# Altium PCB nanopiair_audiohat_test.PcbDoc
Units mm, origin at the board's own origin, x right, y up, seen from the top; angles counter-clockwise.
Board outline 40.01 x 40.01 mm, 4 copper layers (Top Layer, GND, POWER, Bottom Layer), stack 0.778 mm thick; 70 components, 55 nets, 271 pads, 272 vias.
Unrouted connection lines stored in the file: 9.
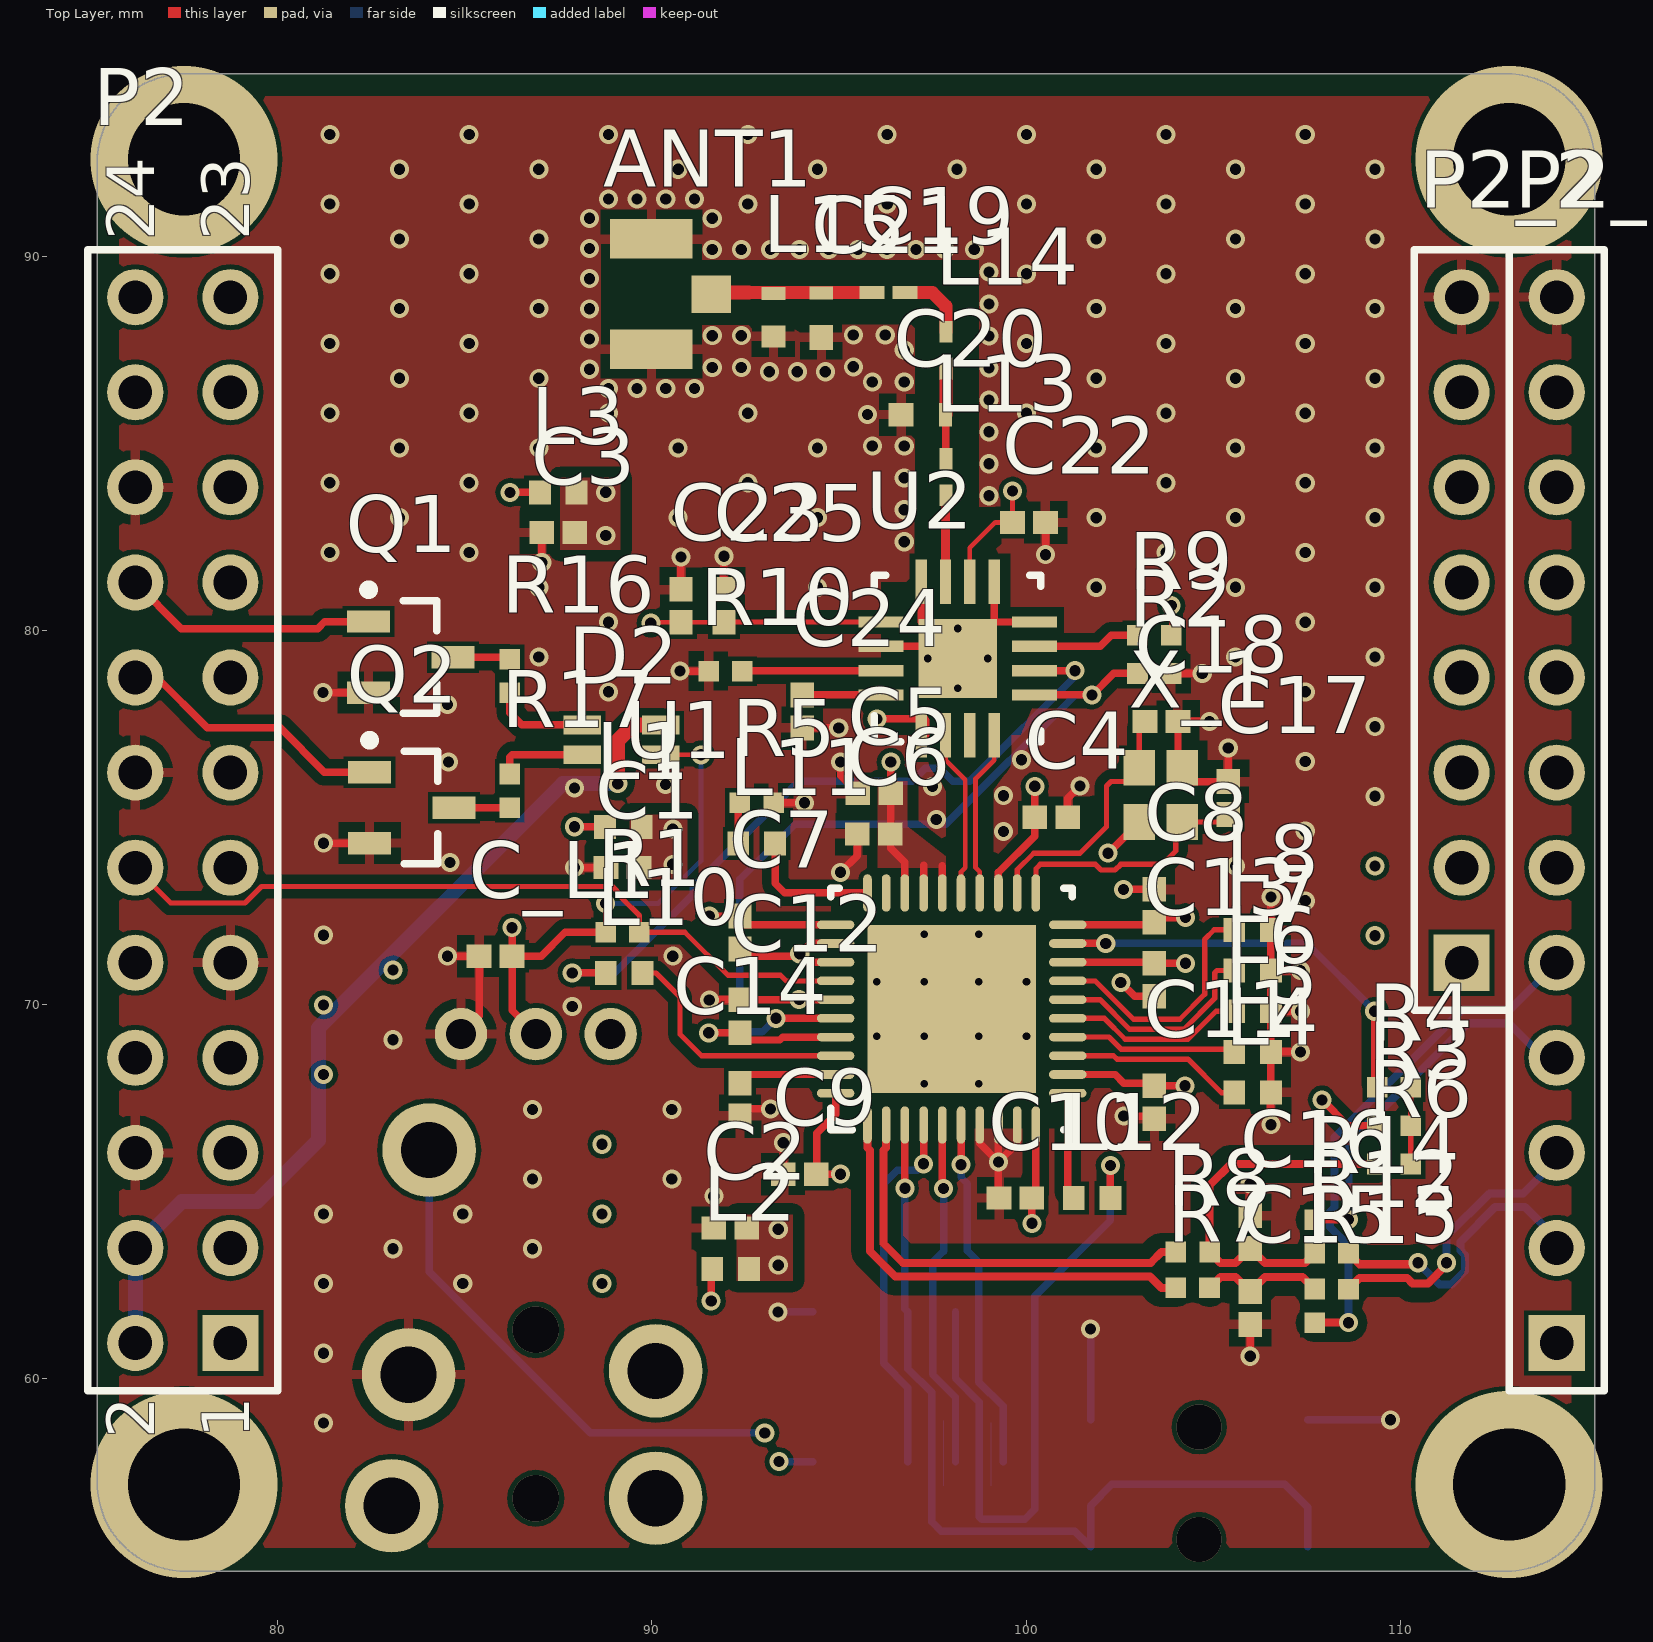
[diagram p0: Top Layer view]
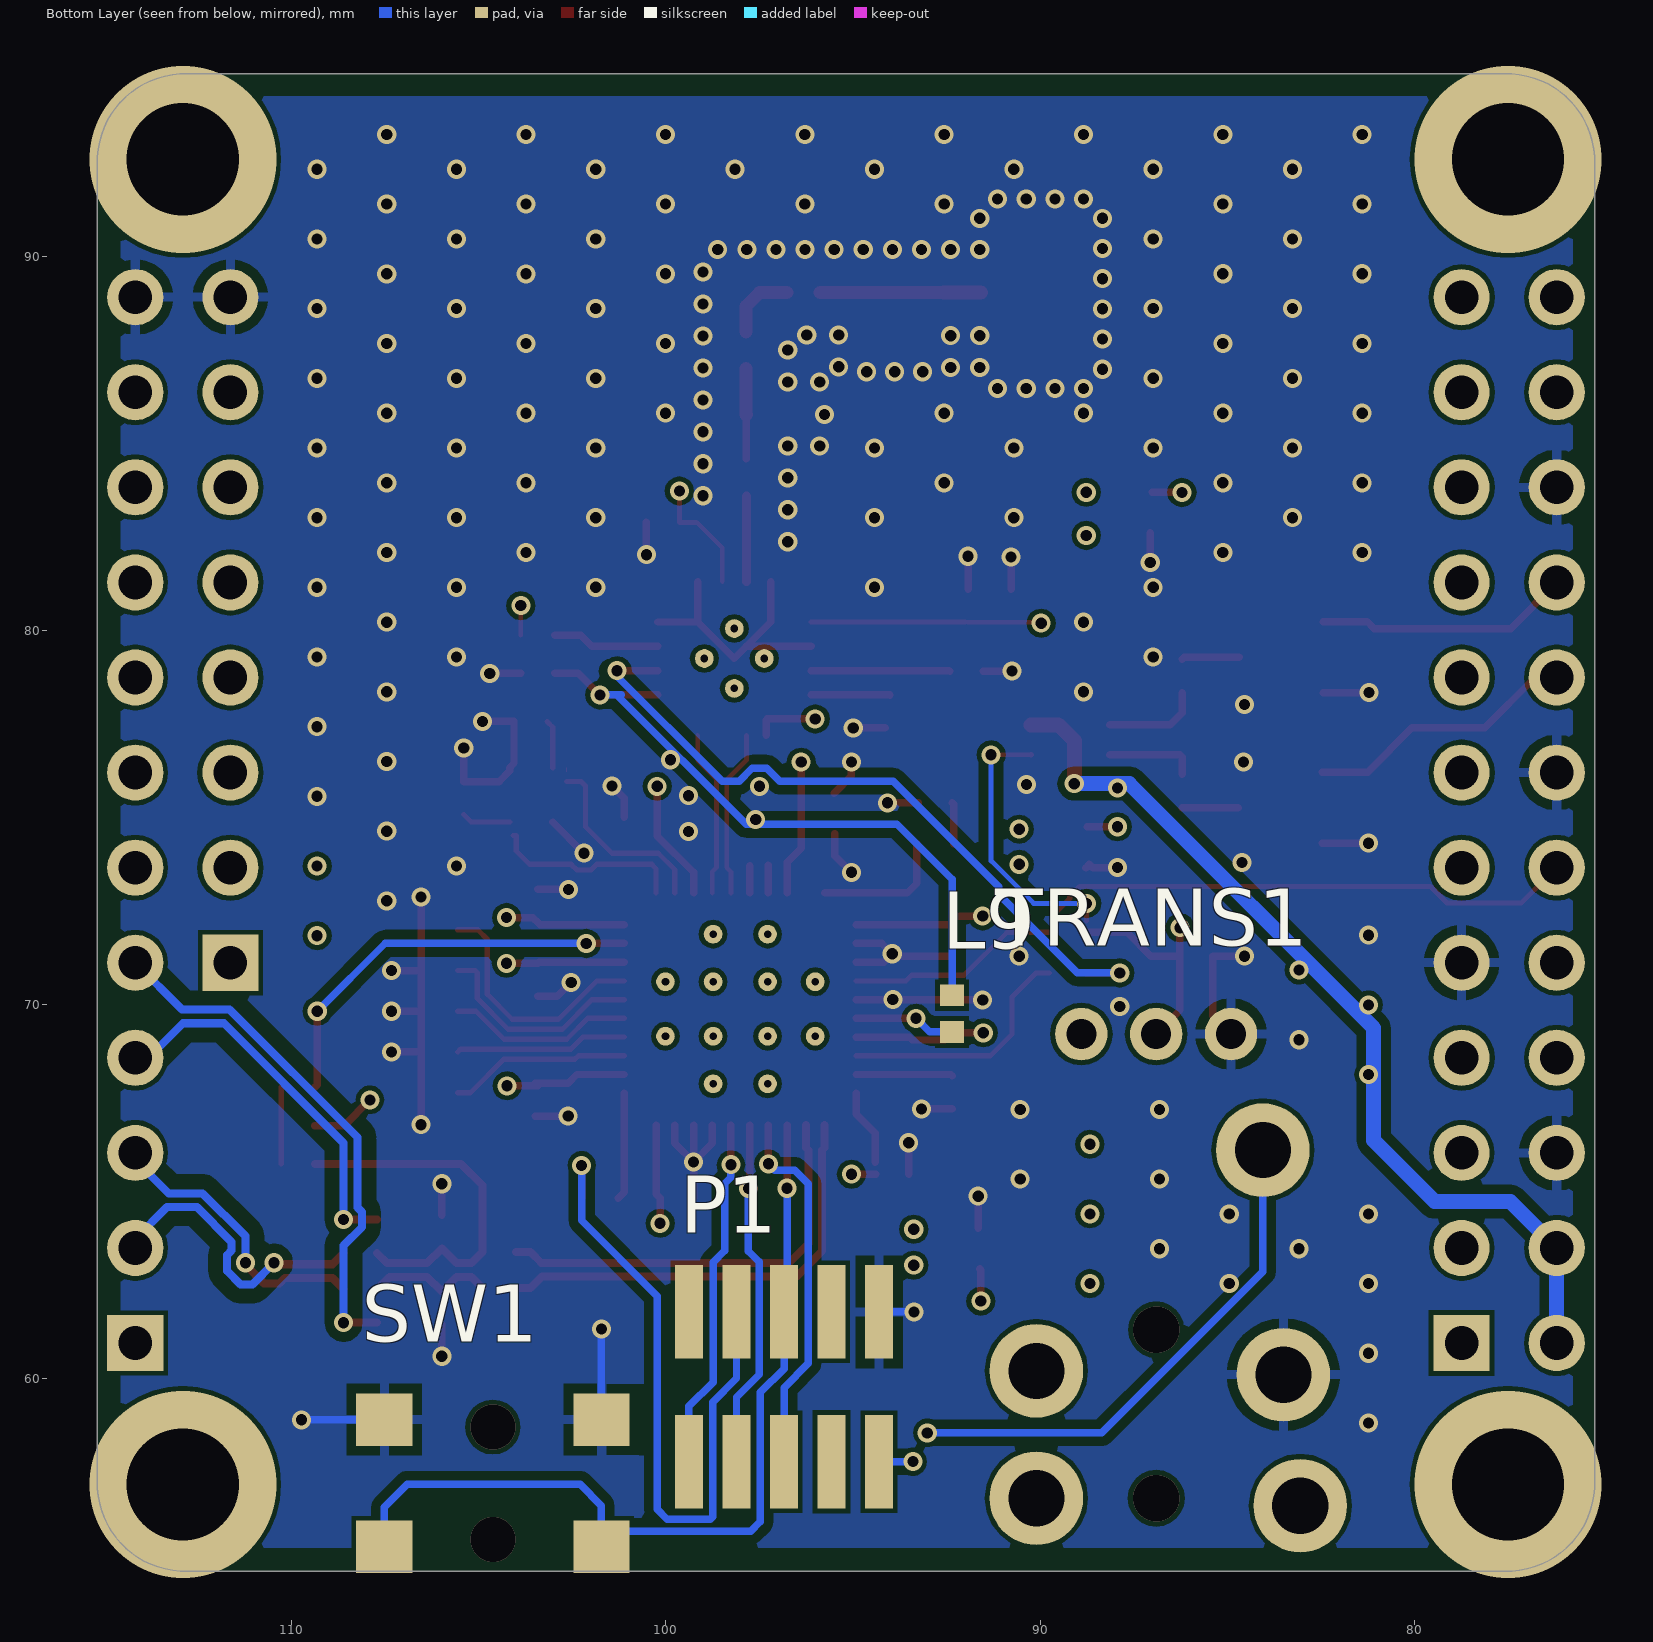
[diagram p1: Bottom Layer view, seen from below]
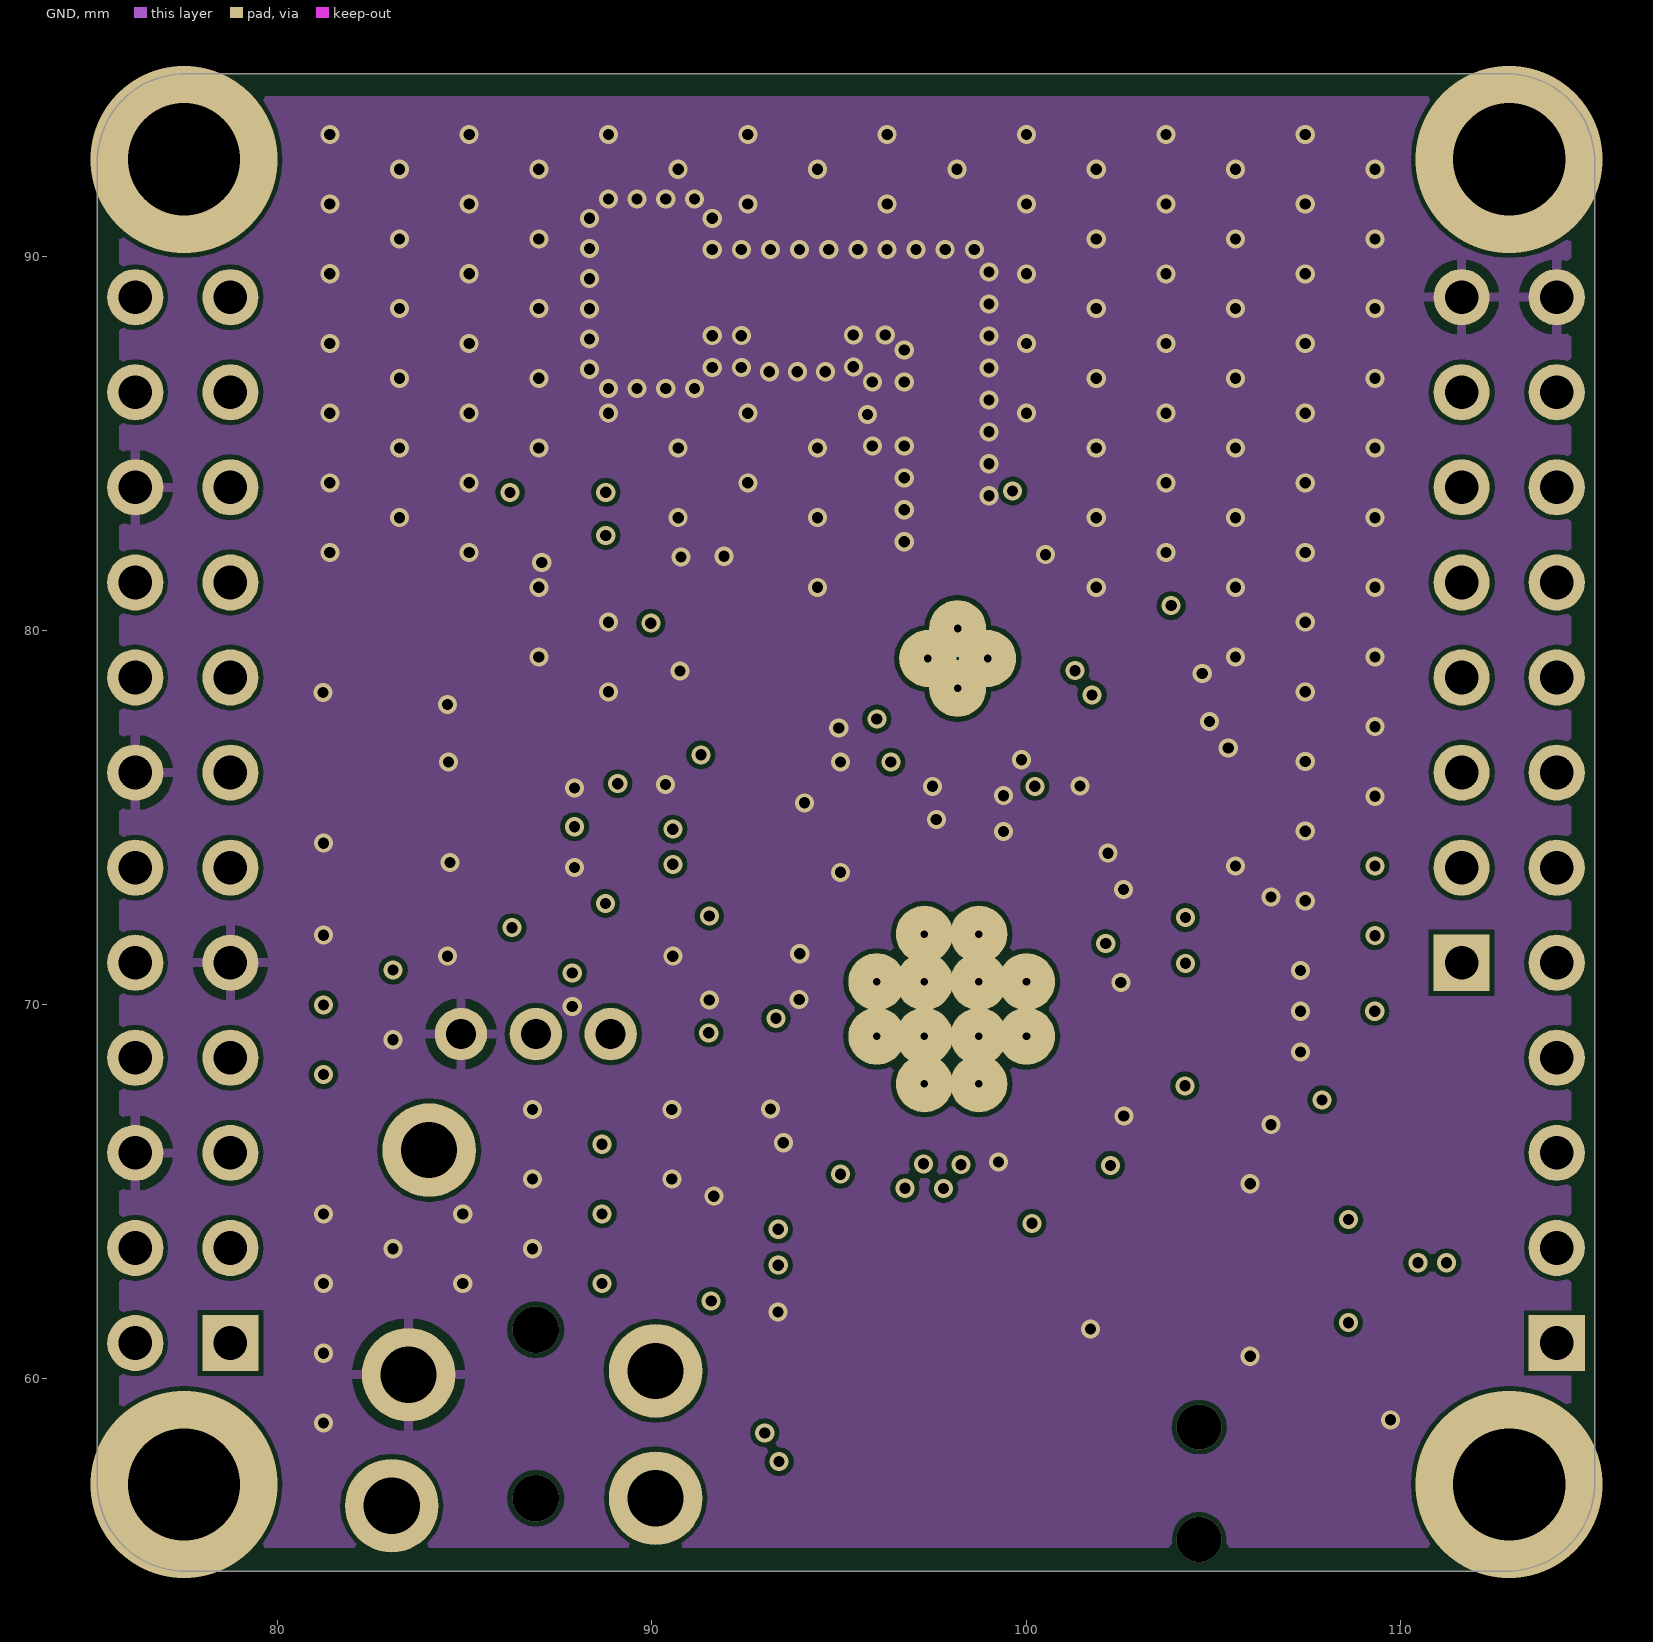
[diagram p2: GND]
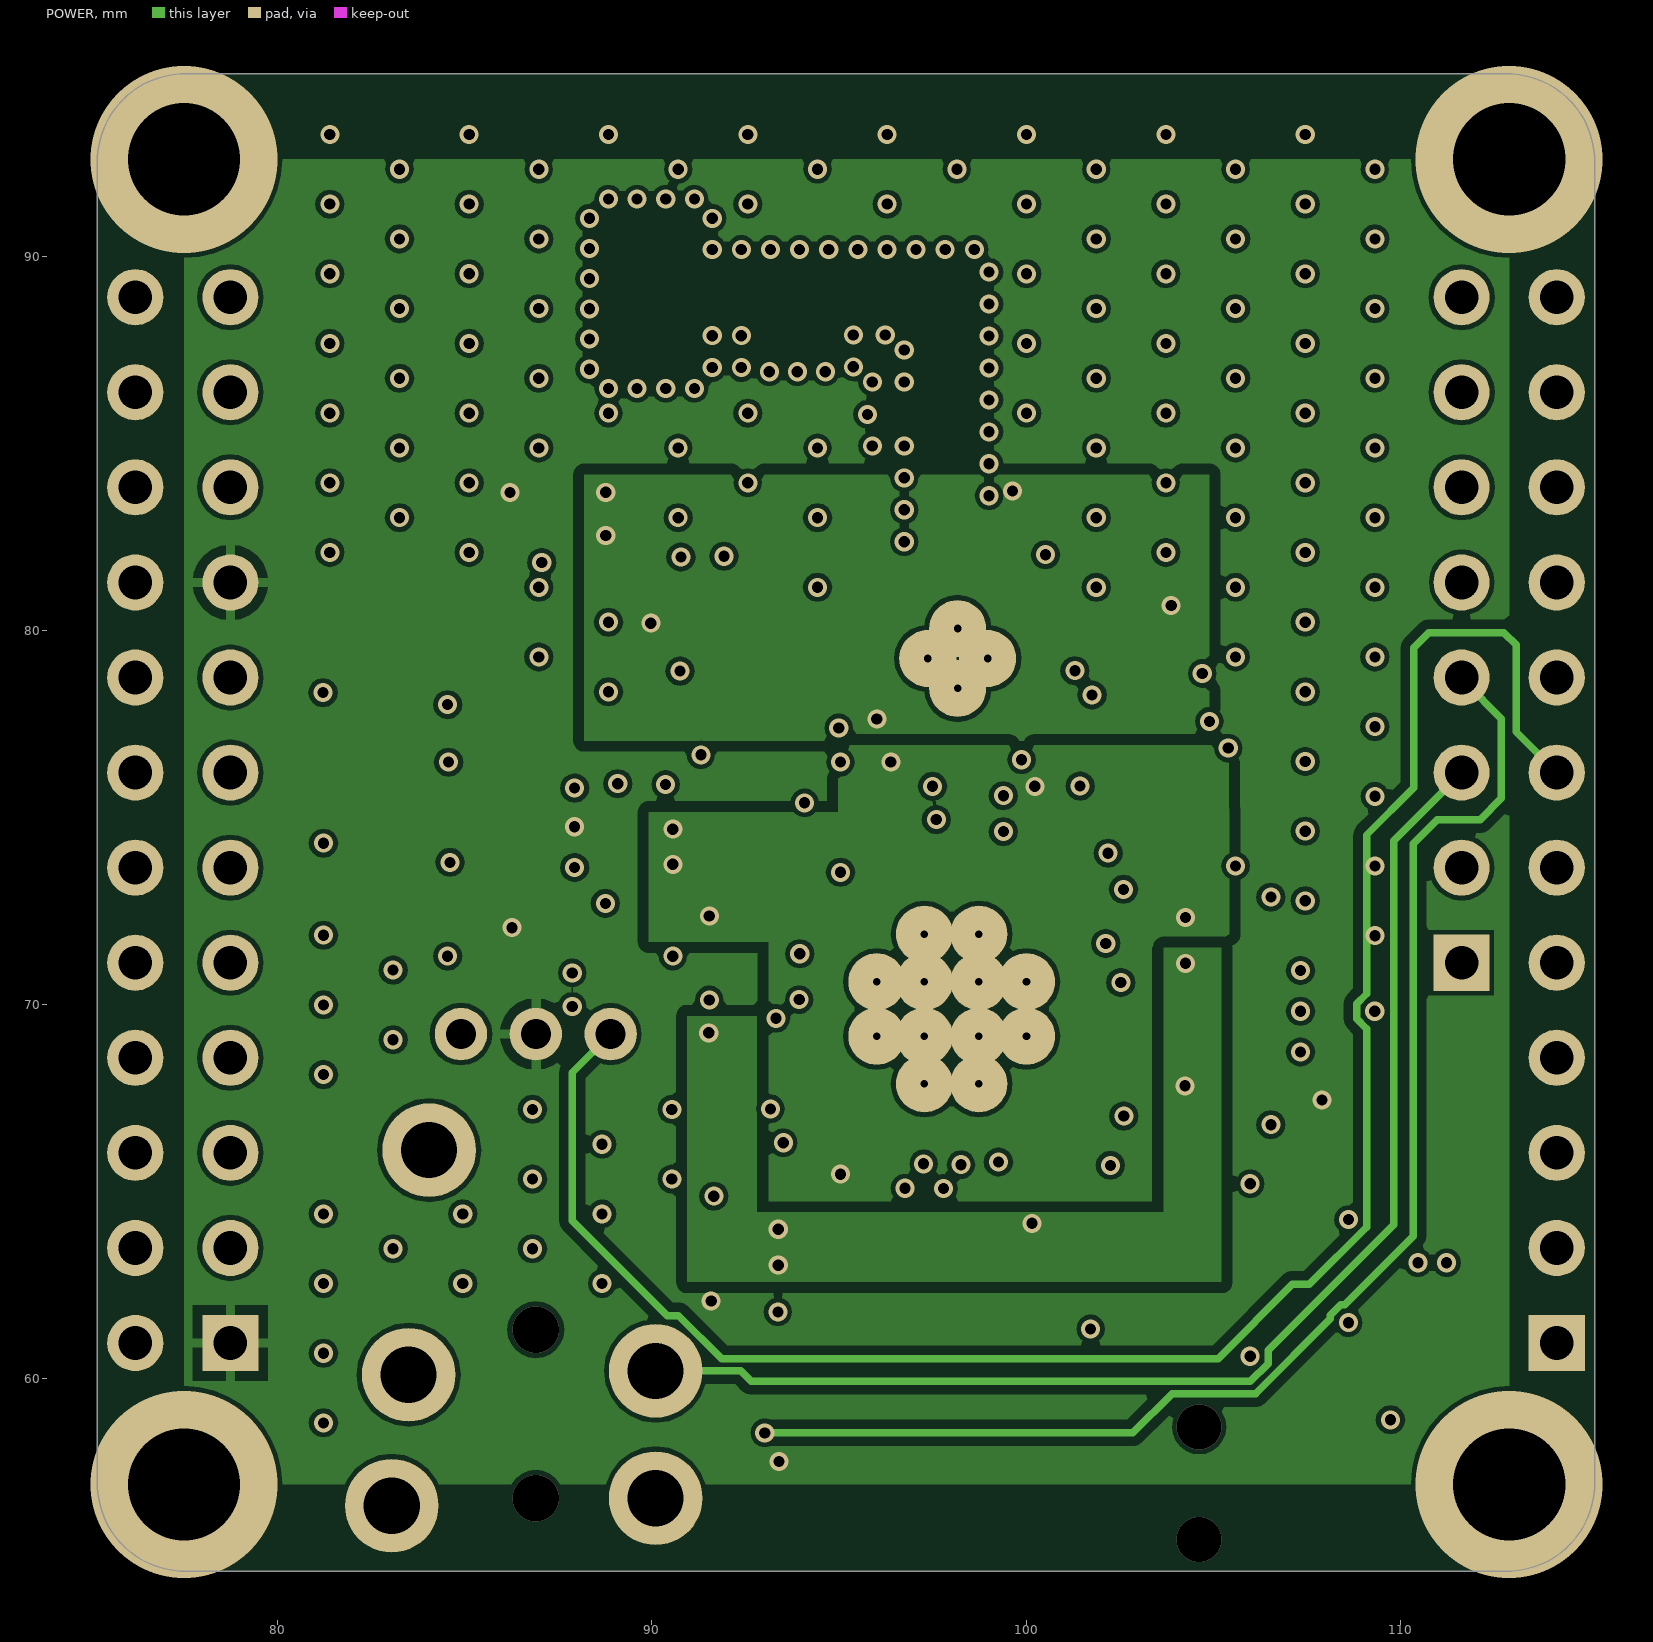
[diagram p3: POWER]
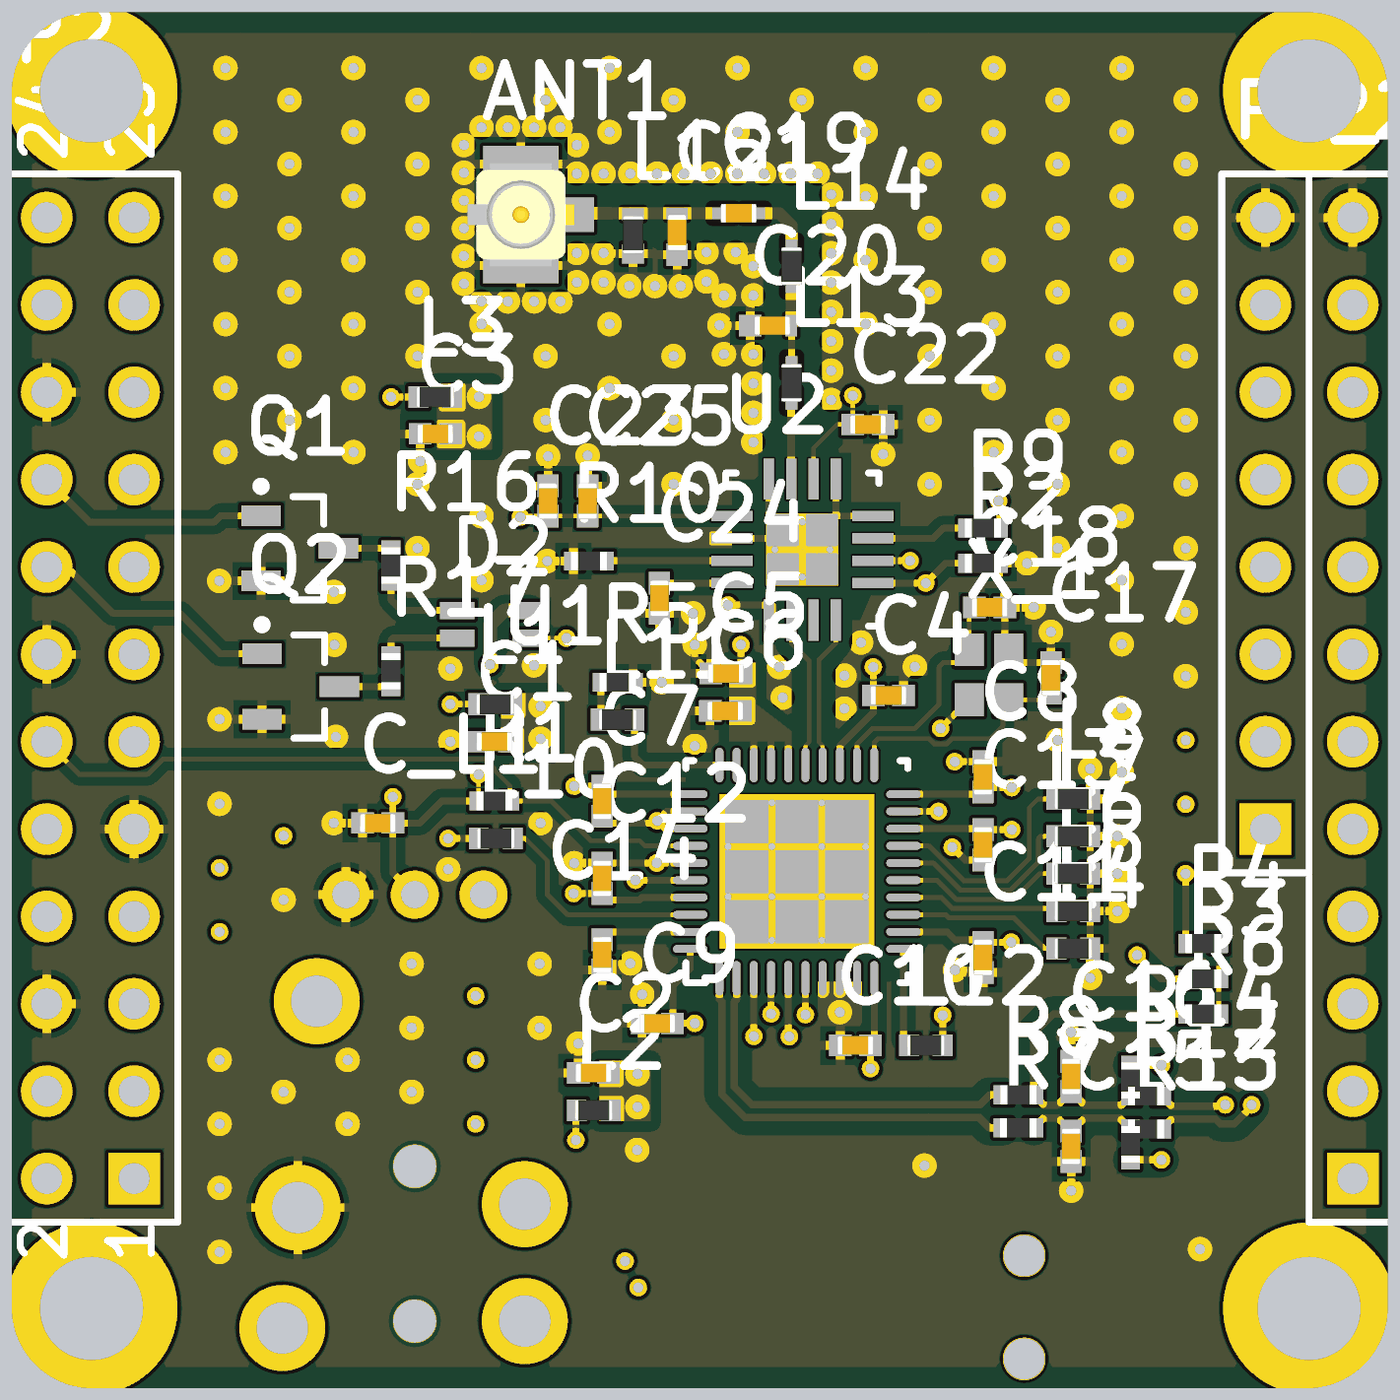
[diagram p4: 3D render of the assembled board from above, using the file's embedded part models]

## Layer stack, top to bottom
Top Solder: solder mask 0.0102, Solder Resist, Dk 3.5
Top Layer: signal copper 0.0356
Dielectric 1: core 0.254, FR-4, Dk 4.2
GND: signal copper 0.036
Dielectric 3: prepreg 0.127, Dk 4.2
POWER: signal copper 0.036
Dielectric 2: core 0.254, Dk 4.2
Bottom Layer: signal copper 0.0356
Bottom Solder: solder mask 0.0102, Solder Resist, Dk 3.5

## Board outline
75.184,57.277 ccw(c77.534,57.213) 77.594,54.864 112.776,54.864 ccw(c112.84,57.213) 115.189,57.274 115.189,92.456 ccw(c112.84,92.519) 112.779,94.869 77.597,94.869 ccw(c77.534,92.519) 75.184,92.459

## Design rules (kind name [scope] priority, off if disabled: settings)
Clearance Clearance_1 [(InDifferentialPairClass('All Differential Pairs'))] p1: gap=0.127 ignorepadtopadclearanceinfootprint=FALSE except(0: Arc-Hole Track-Hole SMDPad-Hole THPad-Hole Via-Hole Fill-Hole Poly-Hole Region-Hole Text-Hole; 0.3: Poly-Poly; 0.4: Arc-Track Arc-Poly Track-Poly)
Clearance [All] p2: gap=0.127 ignorepadtopadclearanceinfootprint=FALSE except(0: Arc-Hole Track-Hole SMDPad-Hole THPad-Hole Via-Hole Fill-Hole Poly-Hole Region-Hole Text-Hole; 0.254: Track-Poly; 0.3: Poly-Poly)
DiffPairsRouting [InDifferentialPair('RF')] p1: maxlimit=0.254 minlimit=0.127 mostfreqgap=0.152 toplayer_minwidth=0.127 toplayer_maxwidth=0.381 toplayer_prefwidth=0.127 midlayer1_minwidth=0.127 midlayer1_maxwidth=0.381 midlayer1_prefwidth=0.127 midlayer2_minwidth=0.127 midlayer2_maxwidth=0.381 midlayer2_prefwidth=0.127 bottomlayer_minwidth=0.127 bottomlayer_maxwidth=0.381 bottomlayer_prefwidth=0.127 maxuncoupledlength=12.7
DiffPairsRouting USBDiff [All] p2: maxlimit=0.152 minlimit=0.152 mostfreqgap=0.152 toplayer_minwidth=0.216 toplayer_maxwidth=0.216 toplayer_prefwidth=0.216 midlayer1_minwidth=0.216 midlayer1_maxwidth=0.216 midlayer1_prefwidth=0.216 midlayer2_minwidth=0.216 midlayer2_maxwidth=0.216 midlayer2_prefwidth=0.216 bottomlayer_minwidth=0.216 bottomlayer_maxwidth=0.216 bottomlayer_prefwidth=0.216 maxuncoupledlength=12.7
PolygonConnect PolygonConnect_17 [All vs IsVia OR InComponent('U1') OR InComponent('U2')] p1: connectstyle=Direct reliefconductorwidth=0.254 reliefentries=2 polygonreliefangle="90 Angle" airgapwidth=0.254
PolygonConnect PolygonConnect_6 [All vs IsNamedPolygon('VDD')] p2: connectstyle=Direct reliefconductorwidth=0.254 reliefentries=4 polygonreliefangle="90 Angle" airgapwidth=0.254
PolygonConnect PolygonConnect_5 [All vs IsNamedPolygon('VDD_CC2590')] p3: connectstyle=Direct reliefconductorwidth=0.254 reliefentries=4 polygonreliefangle="90 Angle" airgapwidth=0.254
PolygonConnect [All] p4: connectstyle=Relief reliefconductorwidth=0.254 reliefentries=4 polygonreliefangle="90 Angle" airgapwidth=0.254
RoomDefinition nanopiair_audiohat [InComponentClass('nanopiair_audiohat')] p1: confinementstyle=ConfineIn formatcopy=TRUE lockcomponents=FALSE outline 0,0 50.8,0 50.8,25.4 0,25.4
RoutingVias [All] p1: holewidth=0.3 width=0.51 viastyle="Through Hole" minholewidth=0.254 minwidth=0.457 maxholewidth=0.711 maxwidth=0.914
SolderMaskExpansion [All] p1: expansion=0.102
Width [All] p1: maxlimit=5 minlimit=0.127 preferedwidth=0.2
29 further rules are at their usual default settings.

## Classes and differential pairs
differential pair USB3: +USB3_P -USB3_N
differential pair USB2: +USB2_P -USB2_N
differential pair USBPI: +USBPI_P -USBPI_N
differential pair USB: +USB_P -USB_N
differential pair RF: +RF_P -RF_N

## Components (designator, comment, footprint, x,y, rotation, side; value= is the part's Value field where it differs from the comment)
ANT1 "UFL ANT" UFL_ANT 90.688,88.384 r90 top
C1 "" C_0402 89.216,73.664 r0 top value=2.2uF
C2 "" C_0402 92.096,64.032 r0 top value=2.2uF
C3 "" C_0402 87.499,82.611 r0 top value=2.2uF
C4 "" C_0402 100.672,75.008 r180 top value=100nF
C5 "" C_0402 95.944,75.648 r0 top value=100nF
C6 "" C_0402 95.928,74.56 r0 top value=220pF
C7 "" C_0402 92.352,71.928 r90 top value=100nF
C8 "" C_0402 103.424,72.64 r270 top value=100nF
C9 "" C_0402 93.952,65.472 r0 top value=1uF
C10 "" C_0402 99.712,64.832 r180 top value=100nF
C11 "" C_0402 103.424,67.392 r90 top value=100nF
C12 "" C_0402 92.352,69.688 r270 top value=100nF
C13 "" C_0402 103.424,70.664 r90 top value=100nF
C14 "" C_0402 92.352,67.464 r90 top value=1uF
C15 "" C_0402 105.984,61.896 r90 top value=47pF
C16 "" C_0402 105.984,63.928 r270 top value=47pF
C17 "" C_0402 105.398,75.52 r270 top value=12pF
C18 "" C_0402 103.616,77.568 r180 top value=12pF
C19 "" C_0402_RF_IN 96.32,89.024 r0 top value=20pF
C20 "" C_0402_RF_IN_OUT 97.536,85.76 r0 top value=1.6pF
C21 "" C_0402_RF_IN_OUT 94.528,88.704 r90 top value=1.3pF
C22 "" C_0402 100.077,82.883 r180 top value=1nF
C23 "" C_0402 90.777,80.657 r270 top value=1nF
C24 "" C_0402 94.016,77.832 r90 top value=1nF
C25 "" C_0402 91.927,80.657 r270 top value=18pF
C_L1 "" C_0402 85.824,71.296 r0 top value=0.1uF
D2 "RGB" RGB 89.088,77.824 r180 top
L1 "Inductor" L_0402 89.238,74.752 r0 top value="EMI HF block"
L2 "Inductor" L_0402 92.103,62.944 r0 top value="EMI HF block"
L3 "Inductor" L_0402 87.499,83.683 r0 top value="EMI HF block"
L4 "Inductor" L_0402 106.048,67.648 r0 top value=6.8nF
L5 "Inductor" L_0402 106.048,68.736 r0 top value=6.8nF
L6 "Inductor" L_0402 106.048,69.824 r0 top value=6.8nF
L7 "Inductor" L_0402 106.048,70.912 r0 top value=6.8nF
L8 "Inductor" L_0402 106.048,72 r0 top value=6.8nF
L9 "Inductor" L_0402 92.352,69.76 r90 bottom value=6.8nF
L10 "Inductor" L_0402 89.258,70.848 r180 top value=6.8nF
L11 "Inductor" L_0402 92.8,74.304 r180 top value=6.8nF
L12 "Inductor" L_0402 101.76,64.832 r180 top value=6.8nF
L13 "Inductor" L_0402_RF_IN 97.856,84.096 r90 top value="2.2nH RF"
L14 "Inductor" L_0402_RF_IN 97.856,87.488 r270 top value="3.9nH RF"
L15 "Inductor" L_0402_RF_IN_OUT 93.248,88.512 r270 top value="1.5nH DNM"
P1 "debug" "2x5 1.27mm header" 96.842,59.792 r0 bottom
P2 "Header 12X2" HDR2X12 78.74,60.96 r90 top locked
P2_1 "" HDR1X12 114.173,60.96 r90 top locked
P2_2 "Header 8" HDR1X8 111.633,71.12 r90 top locked
Q1 "QNPN" SOT-23B_N 83.557,79.286 r0 top
Q2 "QNPN" SOT-23B_N 83.584,75.264 r0 top
R1 "Res1" R_0402 89.218,71.936 r180 top
R2 "Res1" R_0402 103.424,78.848 r180 top value=10k
R3 "Res1" R_0402 109.824,66.768 r180 top value=NM
R4 "Res1" R_0402 109.824,67.792 r0 top value=0
R5 "Res1" R_0402 92.802,75.392 r180 top value=56k
R6 "Res1" R_0402 109.824,65.744 r0 top value="10k (ev mindre)"
R7 "Res1" R_0402 104.448,62.432 r0 top value=33
R8 "Res1" R_0402 104.45,63.392 r0 top value=33
R9 "Res1" R_0402 103.424,79.872 r0 top value=4.3k
R10 "Res1" R_0402 91.968,78.912 r0 top value=4.3k
R12 "Res1" R_0402 108.162,63.36 r180 top value=0
R13 "Res1" R_0402 108.162,62.4 r180 top value=0
R14 "Res1" R_0402 107.712,63.808 r270 top value=0
R15 "Res1" R_0402 107.712,61.954 r90 top value=0
R16 "Res1" R_0402 86.208,78.782 r90 top value=330
R17 "Res1" R_0402 86.208,75.712 r270 top value=330
SW1 "edge switch" "edge swich" 104.621,57.216 r270 bottom
TRANS1 "newComboJack" "audio combojack" 86.825,58.94 r0 bottom locked
U1 "CC8531RHAR" RHA0040H 98.009,69.885 r90 top value=Value
U2 "CC2590RGVR" RGV0016A 98.17,79.248 r90 top value=Value
X_1 "X_48" "48Mhz 2x1.6mm SMD" 104.679,74.372 r90 top

## Footprints (in the part's own frame and the unit in brackets; to place one, negate y for a bottom-side part, rotate by r counter-clockwise, add the part's x,y. Pads: shape width x height; smd on the part's side, far side on the other; paste and mask are expansions set on the pad)
"2x5 1.27mm header" [mm]
  rect 0.75x2.5 smd: 1(-2.54,-2) 2(-2.54,2) 3(-1.27,-2) 4(-1.27,2) 5(0,-2) 6(0,2) 7(1.27,-2) 8(1.27,2) 9(2.54,-2) 10(2.54,2)
"48Mhz 2x1.6mm SMD" [mm]
  rect 0.95x0.85 smd: 1(0.508,0.508) 2(1.958,0.508) 3(1.958,1.658) 4(0.508,1.658)
  body extent 0.1,0.15 2.35,1.97, height 0.5
"audio combojack" [mm] "FCR684204T"
  round 2.5 hole 1.5: 1(3.275,2.125) 2(-2.775,-7.175) 3(3.275,-1.275) 4(-3.325,-1.175) 5(-3.775,2.325)
  round 1.4 hole 0.8: GND(-1.925,-10.275) SIG(2.075,-10.275) VCC(0.075,-10.275)
  body extent -4.85,-11.88 4.45,6.15, height 4.7
C_0402 [mm] "Chip Capacitor, 2-Leads, Body 1,00x0,50mm, IPC Medium Density"
  rect 0.66x0.62 smd: 1(-0.44,0) 2(0.44,0)
  body extent -0.53,-0.28 0.53,0.28, height 0.55
C_0402_RF_IN [mm] "Chip Capacitor, 2-Leads, Body 1,00x0,50mm, IPC Medium Density"
  rect 0.66x0.343 smd mask+0.202: 1(-0.44,0) 2(0.44,0)
  body extent -0.53,-0.28 0.53,0.28, height 0.55
C_0402_RF_IN_OUT [mm] "Chip Capacitor, 2-Leads, Body 1,00x0,50mm, IPC Medium Density"
  rect 0.343x0.62 smd: 1(0.31,0)
  rect 0.66x0.62 smd: 2(-0.88,0)
  body extent -0.76,-0.27 0.29,0.28, height 0.55
"edge swich" [mm]
  rect 1.4x1.5 smd: A(-1.7,-2.9) A(-1.7,2.9) B(1.7,-2.9) B(1.7,2.9)
  body extent -3.03,-2.02 4.37,1.96, height 1.5
HDR1X8 [mm] "Connector; Header; 8 Position"
  rect 1.5x1.5 hole 0.9: 1(0,0)
  round 1.5 hole 0.9: 2(2.54,0) 3(5.08,0) 4(7.62,0) 5(10.16,0) 6(12.7,0) 7(15.24,0) 8(17.78,0)
  silkscreen extent -1.27,-1.27 19.05,1.27
HDR1X12 [mm] "Connector; Header; 12 Position"
  rect 1.5x1.5 hole 0.9: 1(0,0)
  round 1.5 hole 0.9: 2(2.54,0) 3(5.08,0) 4(7.62,0) 5(10.16,0) 6(12.7,0) 7(15.24,0) 8(17.78,0) 9(20.32,0) 10(22.86,0) 11(25.4,0) 12(27.94,0)
  silkscreen extent -1.27,-1.27 29.21,1.27
HDR2X12 [mm] "Connector; Header; 12x2 Position"
  rect 1.5x1.5 hole 0.9: 1(0,0)
  round 1.5 hole 0.9: 2(0,2.54) 3(2.54,0) 4(2.54,2.54) 5(5.08,0) 6(5.08,2.54) 7(7.62,0) 8(7.62,2.54) 9(10.16,0) 10(10.16,2.54) 11(12.7,0) 12(12.7,2.54) 13(15.24,0) 14(15.24,2.54) 15(17.78,0) 16(17.78,2.54) 17(20.32,0) 18(20.32,2.54) 19(22.86,0) 20(22.86,2.54) 21(25.4,0) 22(25.4,2.54) 23(27.94,0) 24(27.94,2.54)
  silkscreen extent -1.27,-1.27 29.21,3.81
L_0402 [mm] "Inductor 0402"
  rect 0.58x0.64 smd: 1(-0.49,0) 2(0.49,0)
  body extent -0.55,-0.3 0.55,0.3, height 0.6
L_0402_RF_IN [mm] "Inductor 0402"
  rect 0.58x0.343 smd mask+0.202: 1(-0.49,0) 2(0.49,0)
  body extent -0.55,-0.3 0.55,0.3, height 0.6
L_0402_RF_IN_OUT [mm] "Inductor 0402"
  rect 0.343x0.64 smd: 1(-0.49,0)
  rect 0.58x0.64 smd: 2(0.66,0)
  body extent -0.44,-0.3 0.66,0.3, height 0.6
R_0402 [mm] "Chip Resistor, 2-Leads, Body 1,00x0,50mm, IPC Medium Density"
  rect 0.55x0.55 smd: 1(-0.45,0) 2(0.45,0)
  body extent -0.53,-0.28 0.53,0.28, height 0.4
RGB [mm]
  rect 1x0.5 smd: 1(-1.15,1.15) 2(0.95,1.15) 3(-1.15,0.35) 4(0.95,0.35)
RGV0016A [mm]
  rect 1.2x0.3 smd paste+0 mask+0.051: 1(-2.05,0.975) 2(-2.05,0.325) 3(-2.05,-0.325) 4(-2.05,-0.975) 9(2.05,-0.975) 10(2.05,-0.325) 11(2.05,0.325) 12(2.05,0.975)
  rect 0.3x1.2 smd paste+0 mask+0.051: 5(-0.975,-2.05) 6(-0.325,-2.05) 7(0.325,-2.05) 8(0.975,-2.05) 13(0.975,2.05) 14(0.325,2.05) 15(-0.325,2.05) 16(-0.975,2.05)
  rect 2.1x2.1 smd paste-1.037 mask+0.051: 17(0,0)
  round 0.5 / inner round 1.524 / far side round 0.5 hole 0.203 mask+0.051: V(-0.8,0) V(0,0.8) V(0,-0.8) V(0.8,0)
  silkscreen extent -2.22,-2.22 2.22,2.22, body extent -2.12,-2.12 2.12,2.12, height 1
RHA0040H [mm]
  oval 1x0.23 smd paste+0 mask+0.076: 1(-3.1,2.25) 2(-3.1,1.75) 3(-3.1,1.25) 4(-3.1,0.75) 5(-3.1,0.25) 6(-3.1,-0.25) 7(-3.1,-0.75) 8(-3.1,-1.25) 9(-3.1,-1.75) 10(-3.1,-2.25) 21(3.1,-2.25) 22(3.1,-1.75) 23(3.1,-1.25) 24(3.1,-0.75) 25(3.1,-0.25) 26(3.1,0.25) 27(3.1,0.75) 28(3.1,1.25) 29(3.1,1.75) 30(3.1,2.25)
  oval 0.23x1 smd paste+0 mask+0.076: 11(-2.25,-3.1) 12(-1.75,-3.1) 13(-1.25,-3.1) 14(-0.75,-3.1) 15(-0.25,-3.1) 16(0.25,-3.1) 17(0.75,-3.1) 18(1.25,-3.1) 19(1.75,-3.1) 20(2.25,-3.1) 31(2.25,3.1) 32(1.75,3.1) 33(1.25,3.1) 34(0.75,3.1) 35(0.25,3.1) 36(-0.25,3.1) 37(-0.75,3.1) 38(-1.25,3.1) 39(-1.75,3.1) 40(-2.25,3.1)
  rect 4.5x4.5 smd paste-2.237 mask+0.051: 41(0,0)
  round 0.5 / inner round 1.524 / far side round 0.5 hole 0.203 mask+0.051: V(-2,-0.727) V(-2,0.727) V(-0.727,2) V(-0.727,-0.727) V(-0.727,0.727) V(-0.727,-2) V(0.727,2) V(0.727,-0.727) V(0.727,0.727) V(0.727,-2) V(2,-0.727) V(2,0.727)
  silkscreen extent -3.22,-3.22 3.22,3.22, body extent -3.13,-3.13 3.13,3.13, height 1
SOT-23B_N [mm] "SOT23, 3-Leads, Body 2.9x1.3mm, Pitch 0.95mm, Lead Span 2.4mm, IPC Medium Density"
  rect 1.15x0.6 smd: 1(-1.125,0.95) 2(-1.125,-0.95) 3(1.125,0)
  silkscreen extent -1.25,-1.5 0.7,1.92, body extent -0.7,-1.5 0.7,1.5, height 1.14
UFL_ANT [mm]
  rect 1.05x2.2 smd: 1(-0.875,0.7) 2(2.075,0.7)
  rect 1x1.05 smd: 3(0.6,-0.9)
  body extent -0.9,-0.85 2.1,2.25, height 1.25

## Part data
C1 C2 C3 C4 C5 C6 C7 C8 C9 C10 C11 C12 C13 C14 C15 C16 C17 C18 C19 C20 C21 C22 C23 C24 C25 C_L1: library part Cap
P2: "Header, 12-Pin, Dual row", LatestRevisionDate=17-Jul-2002, LatestRevisionNote="Re-released for DXP Platform.", Publisher="Altium Limited"
P2_1: library part "Header 12", "Header, 12-Pin", LatestRevisionDate=17-Jul-2002, LatestRevisionNote="Re-released for DXP Platform.", Publisher="Altium Limited"
P2_2: "Header, 8-Pin", LatestRevisionDate=17-Jul-2002, LatestRevisionNote="Re-released for DXP Platform.", Publisher="Altium Limited"
Q1 Q2: "NPN Bipolar Transistor", LatestRevisionDate=29-May-2009, LatestRevisionNote="IPC-7351 Footprint Added.", PackageDescription="3-Pin SOT-23 Package 0.95 mm Pitch, 2.4 mm Lead Span", PackageReference=SOT-23B, PackageVersion=Aug-1999, Published=8-Jun-2000, Publisher="Altium Limited"
R1 R2 R3 R4 R5 R6 R7 R8 R9 R10 R12 R13 R14 R15 R16 R17: "Resistor"
  R1: =330
U1 U2: "Imported", Manufacturer="Texas Instruments", RefDes=RefDes, TYPE=TYPE
  U1: PartNumber=CC8531RHAR
  U2: PartNumber=CC2590RGVR

## Via types
v1: diameter 0.51, hole 0.3, Top Layer to Bottom Layer, 263 vias
v2: diameter 5, hole 3, Top Layer to Bottom Layer, 4 vias
v3: diameter 1.2, hole 1.2, Top Layer to Bottom Layer, 3 vias
v4: diameter 1.25, hole 1.25, Top Layer to Bottom Layer, tented both sides, 2 vias

## Nets (pads, with @x,y where several pads share a name; then routed paths per layer and width w, separated by ;. In a path a pad name is that pad's centre, name@x,y a point inside that pad or via, vN(x,y) a via of type N, cw(c..) or ccw(c..) an arc to the next point about the centre after c; other vN are vias at no path point)
3V3: C_L1.2 L1.1 L2.1 L3.1 P1.2 P2.1 P2.17 R3.2 TRANS1.VCC | length 11
  Top Layer w0.2: v1(86.212,83.683) L3.1 ; v1(86.264,72.056) C_L1.2 ; TRANS1.VCC 86.264,69.851 C_L1.2 ; v1(87.936,74.752) L1.1 ; 88.768,71.936 87.68,71.936 87.04,71.296 C_L1.2 ; v1(91.584,62.08) 91.584,62.916 L2.1 ; v1(107.904,67.456) 108.592,66.768 R3.2
  Bottom Layer w0.2: v1(93.4,57.792) P1.2
5V: D2.3 P2.2 P2.4 | length 24.8
  Top Layer w0.4: v1(89.088,75.904) 89.088,77.056 89.506,77.474 D2.3
  Bottom Layer w0.4: P2.2 P2.4 77.44,64.74 79.46,64.74 81.024,66.304 81.088,66.368 81.088,69.376 87.616,75.904 v1(89.088,75.904)
  other v1: 81.226,68.133 81.226,69.994 83.087,70.925
GND: ANT1.1 ANT1.2 C1.1 C2.1 C3.1 C4.1 C5.1 C6.1 C7.1 C8.1 C9.1 C10.2 C11.1 C12.1 C13.1 C14.1 C15.1 C16.1 C17.1 C18.1 C20.2 C21.2 C22.1 C23.1 C24.1 C25.1 C_L1.1 L4.2 L5.2 L6.2 L7.2 L8.2 L15.2 P1.1 P2.6 P2.9 P2.14 P2.20 P2_1.12 P2_2.8 Q1.2 Q2.2 R2.1 R5.1 R10.1 SW1.A TRANS1.4 TRANS1.GND U1.7 U1.8 U1.9 U1.32 U1.33 U1.35 U1.41 U2.8 U2.9 U2.12 U2.14 U2.17 X_1.2 X_1.4 | length 62.1
  Top Layer w0.2: v1(81.216,78.336) Q1.2 ; v1(81.226,74.314) Q2.2 ; v1(84.544,71.296) C_L1.1 85.384,69.699 TRANS1.GND ; v1(87.059,81.812) C3.1 ; v1(87.936,73.664) 88.599,73.664 88.683,73.749 88.772,73.66 C1.1 ; v1(90.752,78.912) R10.1 ; C23.1 v1(90.777,81.959) ; v1(91.536,70.128) C12.1 93.928,70.128 v1(93.935,70.135) U1.35 ; C2.1 v1(91.656,64.884) ; C25.1 v1(91.927,81.98) ; C14.1@92.352,67.216 v1(93.168,67.216) ; C7.1@92.352,71.296 93.888,71.296 v1(93.952,71.36) ; R5.1 v1(94.08,75.392) ; C9.1 v1(93.512,66.312) ; C24.1@94.144,77.392 v1(94.992,77.392) ; U1.33 94.177,71.135 v1(93.952,71.36) ; U1.32 94.226,71.634 v1(93.952,71.36) ; v1(95.04,73.536) 95.488,73.984 C6.1 ; v1(95.04,76.48) 95.04,76.112 C5.1 ; U2.14 U2.17@97.845,79.573 ; U2.12 97.195,80.223 U2.17@97.845,79.573 ; U1.7 98.759,66.297 v1(99.259,65.797) ; U2.9 U2.17@99.145,80.223 ; U1.8 v1(99.259,65.797) ; C10.2 99.259,64.844 v1(99.259,65.797) ; U1.9 99.759,66.296 v1(99.259,65.797) ; U2.8 U2.17@99.145,80.223 ; v1(100.517,82.021) C22.1 ; C4.1 101.112,75.512 v1(101.44,75.84) ; v1(102.189,74.048) X_1.4 ; v1(102.528,70.592) 102.896,70.224 C13.1 ; v1(102.6,73.08) C8.1 ; v1(102.608,67.024) C11.1@103.488,67.024 ; R2.1 v1(104.704,78.848) ; v1(104.896,77.568) C18.1 104.056,76.445 X_1.2 104.171,76.245 104.456,75.96 C17.1 v1(105.398,76.854) ; v1(105.984,60.608) C15.1 ; C16.1 v1(105.984,65.216) ; v1(106.538,66.794) L4.2 L5.2 ; v1(106.538,72.874) L8.2 L7.2 ; v1(107.328,68.736) L5.2 ; v1(107.328,69.824) L6.2 ; v1(107.328,70.912) L7.2 ; U2.17@97.845,79.573 U2.17 U2.17@99.145,80.223 ; L5.2 L6.2 ; L6.2 L7.2
  Bottom Layer w0.2: v1(93.368,61.792) P1.1 ; SW1.A@101.721,58.916 v1(101.721,61.337) ; SW1.A@107.521,58.916 109.732,58.916 v1(109.732,58.908)
  other v1: 81.226,58.826 81.226,60.688 81.226,62.549 84.949,62.549 83.087,63.48 86.81,63.48 81.226,64.41 84.949,64.41 86.81,65.341 90.533,65.341 86.81,67.202 90.533,67.202 83.087,69.064 87.872,69.952 90.56,71.295 81.226,71.856 107.455,72.773 105.594,73.704 84.608,73.801 99.392,74.624 107.455,74.635 97.6,74.944 109.316,75.565 99.392,75.584 87.936,75.787 97.497,75.832 90.368,75.881 84.569,76.48 107.455,76.496 99.877,76.544 109.316,77.427 84.544,78.016 88.842,78.357 107.455,78.357 86.98,79.288 105.594,79.288 109.316,79.288 88.842,80.219 107.455,80.219 86.98,81.149 94.426,81.149 101.871,81.149 105.594,81.149 109.316,81.149 81.397,82.08 85.119,82.08 103.732,82.08 107.455,82.08 96.744,82.368 83.258,83.011 90.703,83.011 94.426,83.011 101.871,83.011 105.594,83.011 109.316,83.011 96.744,83.221 99.008,83.597 81.397,83.941 85.119,83.941 92.564,83.941 103.732,83.941 107.455,83.941 96.744,84.075 99.008,84.45 83.258,84.872 86.98,84.872 90.703,84.872 94.426,84.872 101.871,84.872 105.594,84.872 109.316,84.872 95.891,84.928 96.744,84.928 99.008,85.303 95.759,85.77 81.397,85.803 85.119,85.803 88.842,85.803 92.564,85.803 100.01,85.803 103.732,85.803 107.455,85.803 99.008,86.157 88.841,86.464 89.606,86.464 90.371,86.464 91.136,86.464 95.891,86.635 96.744,86.635 83.258,86.733 86.98,86.733 101.871,86.733 105.594,86.733 109.316,86.733 93.138,86.909 93.886,86.909 94.634,86.909 88.331,86.976 91.613,87.019 92.39,87.019 99.008,87.01 95.382,87.04 96.744,87.488 81.397,87.664 85.119,87.664 100.01,87.664 103.732,87.664 107.455,87.664 88.331,87.782 99.008,87.863 91.613,87.872 92.39,87.872 95.382,87.893 96.235,87.893 83.258,88.595 86.98,88.595 88.331,88.589 101.871,88.595 105.594,88.595 109.316,88.595 99.008,88.717 88.331,89.395 81.397,89.525 85.119,89.525 100.01,89.525 103.732,89.525 107.455,89.525 99.008,89.57 91.613,90.176 92.39,90.176 93.168,90.176 93.946,90.176 94.724,90.176 95.502,90.176 96.28,90.176 97.058,90.176 97.836,90.176 98.614,90.176 88.331,90.202 83.258,90.456 86.98,90.456 101.871,90.456 105.594,90.456 109.316,90.456 88.331,91.008 91.613,91.008 81.397,91.387 85.119,91.387 92.564,91.387 96.287,91.387 100.01,91.387 103.732,91.387 107.455,91.387 88.841,91.52 89.606,91.52 90.371,91.52 91.136,91.52 83.258,92.317 86.98,92.317 90.703,92.317 94.426,92.317 98.148,92.317 101.871,92.317 105.594,92.317 109.316,92.317 81.397,93.248 85.119,93.248 88.842,93.248 92.564,93.248 96.287,93.248 100.01,93.248 103.732,93.248 107.455,93.248
IOVDD: C2.2 C10.1 C11.2 C12.2 C13.2 L2.2 U1.10 U1.12 U1.18 U1.37 | length 12.6
  Top Layer w0.2: v1(91.52,69.248) C12.2 92.544,69.056 93.418,69.056 93.496,69.134 U1.37 ; v1(100.152,64.159) C10.1 100.259,64.939 U1.10 ; U1.12 102.377,68.134 102.608,67.904 C11.2@103.488,67.904 ; U1.18 103.393,71.135 C13.2 v1(104.256,71.104) ; C11.2 v1(104.24,67.832)
  other v1: 93.376,63.04 93.376,64
NetANT1_3: ANT1.3 C19.1 C21.1 L15.1 | length 4.2
  Top Layer w0.35: 92.63,89.024 C19.1
  Top Layer w0.38: ANT1.3@91.588,89.024 92.586,89.024
NetC14_2: C14.2 U1.39 | length 2.6
  Top Layer w0.2: C14.2@92.352,68.096 92.39,68.134 U1.39
NetC19_2: C19.2 L14.1 | length 1.9
  Top Layer w0.35: C19.2 97.497,89.024 97.856,88.665 L14.1
NetC20_1: C20.1 L13.2 L14.2 | length 2.4
  Top Layer w0.203: L13.2 C20.1@97.856,85.75
  Top Layer w0.343: C20.1@97.856,85.75 C20.1 C20.1@97.856,85.77
  Top Layer w0.35: C20.1@97.856,85.77 L14.2
NetD2_1: D2.1 R1.2 | length 7.4
  Top Layer w0.127: 88.758,72.227 v1(88.758,72.704) ; D2.1 v1(91.311,76.674)
  Top Layer w0.14: D2.1 D2.1@90.24,76.672
  Bottom Layer w0.127: v1(88.758,72.704) 90.176,72.704 91.311,73.839 v1(91.311,76.674)
NetD2_2: D2.2 R17.1 | length 2.4
  Top Layer w0.2: R17.1 86.208,76.608 86.274,76.674 D2.2
NetD2_4: D2.4 R16.1 | length 2.6
  Top Layer w0.2: R16.1 86.208,77.794 86.528,77.474 D2.4
NetL4_1: L4.1 U1.13 | length 4.9
  Top Layer w0.14: U1.13 102.336,68.635 102.426,68.544 104.32,68.544 105.216,67.648 L4.1
NetL5_1: L5.1 U1.14 | length 4.6
  Top Layer w0.14: U1.14 102.213,69.134 102.537,68.811 105.483,68.811 L5.1
NetL6_1: L6.1 U1.15 | length 5
  Top Layer w0.14: U1.15 102.091,69.635 102.648,69.078 104.323,69.078 105.069,69.824 L6.1
NetL7_1: L7.1 U1.16 | length 5.8
  Top Layer w0.14: U1.16 101.969,70.135 102.758,69.345 104.212,69.345 105.035,70.168 105.035,70.848 105.099,70.912 L7.1
NetL8_1: L8.1 U1.17 | length 6.7
  Top Layer w0.14: U1.17 101.846,70.634 102.869,69.612 104.101,69.612 104.768,70.279 104.768,71.744 105.024,72 L8.1
NetL9_1: L9.1 U1.36 | length 2.7
  Top Layer w0.2: v1(93.315,69.635) U1.36
  Bottom Layer w0.2: L9.1 92.95,69.27 v1(93.315,69.635)
NetL9_2: L9.2 R2.2 U2.5 | length 17.7
  Top Layer w0.2: U2.5 v1(101.76,78.273) 102.335,78.848 R2.2
  Bottom Layer w0.2: L9.2 92.352,73.344 93.824,74.816 97.856,74.816 101.313,78.273 ; 101.185,78.273 v1(101.76,78.273)
NetL10_1: L10.1 U1.38 | length 6.7
  Top Layer w0.14: L10.1 90.11,70.848 90.752,70.206 90.752,69.209 91.327,68.635 U1.38
NetL10_2: L10.2 U2.6 | length 19.3
  Top Layer w0.2: v1(87.872,70.848) L10.2 ; U2.6 v1(101.301,78.923)
  Bottom Layer w0.2: v1(87.872,70.848) 89.007,70.848 91.107,72.949 91.107,73.152 93.923,75.968 96.952,75.968 97.298,76.314 97.697,76.314 98.043,75.968 98.496,75.968 v1@101.429,78.901 ; v1@101.301,78.901 v1(101.301,78.923)
NetL11_1: L11.1 U1.30 | length 3.6
  Top Layer w0.2: L11.1 93.29,73.238 93.543,72.985 U1.30
NetL11_2: L11.2 R5.2 | length 1.1
  Top Layer w0.2: L11.2 92.31,75.35 R5.2
NetL12_1: L12.1 P1.7 | length 18.2
  Top Layer w0.2: L12.1 v1(102.25,65.706)
  Bottom Layer w0.2: P1.7 98.112,60.017 98.752,59.377 98.752,56.32 98.816,56.256 99.968,56.256 100.232,56.52 100.232,62.216 102.25,64.234 v1(102.25,65.706)
NetL12_2: L12.2 U1.11 | length 2.9
  Top Layer w0.2: U1.11 101.11,64.992 L12.2
NetL13_1: L13.1 U2.11 | length 2.3
  Top Layer w0.203: L13.1@97.845,83.595 L13.1
  Top Layer w0.235: U2.11 L13.1@97.845,83.595
NetP1_5: P1.5 SW1.B U1.3 | length 23.9
  Top Layer w0.2: v1(96.759,65.097) U1.3
  Bottom Layer w0.2: v1(96.759,65.097) 96.759,61.875 P1.5 96.842,60.278 97.472,59.648 97.472,56.192 97.735,55.929 100.103,55.929 100.11,55.936 101.301,55.936 101.721,55.516 101.721,56.619 102.284,57.183 106.913,57.183 107.521,56.575 SW1.B@107.521,55.516
NetP1_6: P1.6 U1.4 | length 10
  Top Layer w0.2: v1(97.259,65.749) U1.4
  Bottom Layer w0.2: P1.6 96.842,59.766 96.192,60.416 96.192,65.211 96.56,65.579 97.089,65.579 v1(97.259,65.749)
NetP1_8: P1.8 U1.5 | length 11.2
  Top Layer w0.2: U1.5 97.759,65.056 v1@97.791,65.088
  Bottom Layer w0: P1.8@97.792,57.152 P1.8@97.792,58.88
  Bottom Layer w0.2: v1(97.792,65.088) 97.792,63.418 97.51,63.136 97.51,63.078 97.498,63.066 97.498,60.124 98.112,59.51 P1.8
NetP1_10: P1.10 U1.6 | length 11.1
  Top Layer w0.2: v1(98.259,65.725) U1.6
  Bottom Layer w0: P1.10@99.062,57.152 P1.10@99.062,58.826
  Bottom Layer w0.2: v1(98.259,65.725) 98.259,65.389 98.432,65.216 98.432,63.424 98.737,63.119 98.737,59.915 99.382,59.269 P1.10
NetP2_1_7: P2_1.7 TRANS1.SIG | length 52.7
  POWER w0.2: TRANS1.SIG 87.872,68.187 87.872,64.229 90.409,61.692 90.712,61.692 91.862,60.542 105.128,60.542 107.114,62.528 107.562,62.528 109.092,64.058 109.092,69.362 108.83,69.624 108.83,70.024 109.092,70.286 109.092,74.532 110.349,75.789 110.349,79.535 110.754,79.94 112.764,79.94 113.088,79.616 113.088,77.285 P2_1.7
  other v1: 88.671,62.549 88.671,64.41 88.671,66.272 109.316,71.843 109.316,73.704
NetP2_2_3: P2_2.3 TRANS1.3 | length 34.6
  POWER w0.2: TRANS1.3 92.378,60.215 92.659,59.934 105.992,59.934 106.466,60.408 106.466,60.77 109.817,64.121 109.817,74.384 P2_2.3
NetP2_2_4: P2_2.4 TRANS1.2 | length 50.8
  POWER w0.2: v1(93.016,58.56) 102.852,58.56 103.899,59.607 106.127,59.607 108.126,61.606 108.126,61.704 108.408,61.986 108.506,61.986 110.336,63.816 110.336,74.299 110.981,74.944 112.128,74.944 112.697,75.513 112.697,77.639 111.741,78.595 111.488,78.595 P2_2.4
  Bottom Layer w0.2: TRANS1.2 84.05,62.862 88.352,58.56 v1(93.016,58.56)
NetP2_12: P2.12 R1.1 U1.34 | length 20.6
  Top Layer w0.14: P2.12 77.147,72.713 79.132,72.713 79.575,73.156 88.946,73.156 89.21,72.891 89.21,72.838 89.668,72.38 R1.1 90.88,71.936 92.032,70.784 93.44,70.784 93.59,70.634 U1.34
NetP2_16: P2.16 Q2.1 | length 7.3
  Top Layer w0.2: P2.16 76.78,78.74 78.128,77.392 80.069,77.392 81.247,76.214 Q2.1
NetP2_18: P2.18 Q1.1 | length 6.8
  Top Layer w0.2: P2.18 77.432,80.048 81.072,80.048 81.26,80.236 Q1.1
NetQ1_3: Q1.3 R16.2 | length 1.5
  Top Layer w0.2: Q1.3 86.154,79.286 R16.2
NetQ2_3: Q2.3 R17.2 | length 1.5
  Top Layer w0.2: Q2.3 86.206,75.264 R17.2
NetR3_1: R3.1 R4.2 R6.2 | length 2
  Top Layer w0.14: R6.2 R4.2
NetR4_1: R4.1 U1.19 | length 11
  Top Layer w0.2: U1.19 v1(102.126,71.634) ; v1(109.312,69.824) 109.312,67.854 R4.1
  Bottom Layer w0.2: v1(102.126,71.634) 107.501,71.634 v1(109.312,69.824)
NetR9_1: R9.1 U2.7 | length 2.9
  Top Layer w0.2: U2.7 101.973,79.573 102.272,79.872 R9.1
NetR10_2: R10.2 U2.15 | length 3.7
  Top Layer w0.2: R10.2 92.429,78.923 U2.15
RF_N: U1.25 U2.2 | length 4.5
  Top Layer w0.127: U2.2 97.845,76.534 98.37,76.01 98.37,73.658 98.259,73.548 U1.25
RF_P: U1.24 U2.4 | length 4.5
  Top Layer w0.127: U1.24 98.759,73.548 98.649,73.658 98.649,76.039 99.145,76.534 U2.4
USB2_N: P2_1.3 R13.1 | length 7.9
  Top Layer w0.216: R13.1 108.908,62.696 110.179,62.696 110.325,62.55 110.731,62.55 111.232,63.051 v1(111.232,63.104)
  Bottom Layer w0.216: v1(111.232,63.104) 111.232,63.817 112.375,64.96 113.28,64.96 114.173,65.853 P2_1.3 P2_1.3@114.173,65.877
USB2_P: P2_1.2 R12.1 | length 8.4
  Top Layer w0.216: R12.1 108.908,63.064 110.394,63.064 110.418,63.04 110.465,63.087 v1(110.465,63.104)
  Bottom Layer w0.216: v1(110.465,63.104) 111.041,62.528 111.36,62.528 111.722,62.89 111.722,63.307 111.6,63.429 111.6,63.664 112.528,64.592 113.328,64.592 114.173,63.747 P2_1.2 P2_1.2@114.173,63.851
USB3_N: P2_1.5 R15.1 | length 13.9
  Top Layer w0.216: R15.1 v1(108.608,61.504)
  Bottom Layer w0.216: 108.242,66.395 108.242,64.583 108.12,64.461 108.12,64.055 108.608,63.567 v1(108.608,61.504) ; 108.242,66.459 111.655,69.872 112.925,69.872 P2_1.5
USB3_P: P2_1.4 R14.1 | length 10.2
  Top Layer w0.216: R14.1 v1(108.61,64.258)
  Bottom Layer w0.216: v1(108.61,64.258) 108.61,66.242 ; 108.61,66.306 111.808,69.504 112.896,69.504 113.82,68.58 P2_1.4
USB_N: R7.1 U1.1 | length 12
  Top Layer w0.216: U1.1 95.759,66.177 95.825,66.111 95.825,63.412 96.501,62.736 103.311,62.736 103.615,62.432 R7.1
USB_P: R8.1 U1.2 | length 11.3
  Top Layer w0.216: U1.2 96.259,66.177 96.194,66.111 96.194,63.614 96.704,63.104 103.329,63.104 103.617,63.392 R8.1
USBPI_N: C15.2 R7.2 R13.2 R15.2 | length 3.4
  Top Layer w0.216: R7.2 105.194,62.728 105.592,62.728 C15.2 106.376,62.728 107.384,62.728 R13.2
USBPI_P: C16.2 R6.1 R8.2 R12.2 R14.2 | length 9.9
  Top Layer w0.216: R14.2 107.45,63.096 106.376,63.096 C16.2 105.592,63.096 105.196,63.096 R8.2 104.9,65.177 105.467,65.744 R6.1
VDD: C1.2 C4.2 C5.2 C6.2 C7.2 C8.2 C9.2 L1.2 U1.20 U1.23 U1.26 U1.27 U1.28 U1.31 U1.40 | length 17.6
  Top Layer w0.2: v1(91.536,72.368) C7.2 ; C7.2@92.352,72.176 92.393,72.135 U1.31 ; C9.2 v1(95.04,65.472) ; 94.4,65.792 94.4,66.56 94.909,67.069 U1.40 ; C5.2@96.384,75.565 96.384,74.176 96.759,73.801 U1.28 ; C5.2 v1(96.384,76.48) ; U1.27 97.259,73.728 ; U1.26 97.759,73.717 ; U1.23 99.259,73.532 100.232,74.504 C4.2 v1(100.232,75.832) ; U1.20 103.359,72.135 C8.2 103.551,72.327 v1(104.254,72.327)
  other v1: 90.56,73.749 90.56,74.688
VDD_CC2590: C3.2 C22.2 C23.2 C24.2 C25.2 L3.2 R9.2 U2.1 U2.10 U2.13 U2.16 | length 13.8
  Top Layer w0.127: v1@89.987,80.217 C23.2 C25.2 ; C25.2@91.997,80.223 U2.13 ; U2.10 98.495,82.201 99.177,82.883 C22.2 v1(99.637,83.723) ; R9.2 v1(103.874,80.66)
  Top Layer w0.2: C24.2 94.017,78.273 U2.16 ; v1(96.009,77.632) 97.284,77.632 97.323,77.593 U2.1@97.323,77.198
  other v1: 89.972,80.192 88.768,82.535 88.768,83.687
X_N: C17.2 U1.21 X_1.1 | length 6.5
  Top Layer w0.14: U1.21 100.259,73.631 100.377,73.749 101.849,73.749 102.002,73.596 102.376,73.596 102.529,73.749 103.635,73.749 103.998,74.112 103.998,74.517 X_1.1@104.085,74.517 ; X_1.1 105.198,74.88 C17.2
X_P: C18.2 U1.22 X_1.3 | length 6.5
  Top Layer w0: X_1.3@102.659,76.227 X_1.3@102.659,76.33
  Top Layer w0.14: U1.22 99.759,73.604 100.202,74.047 101.439,74.047 102.144,74.752 102.144,75.84 102.264,75.96 X_1.3@102.651,75.96 ; X_1.3 103.021,77.413 C18.2
pads on no net: P1.3 P1.4 P1.9 P2.3 P2.5 P2.7 P2.8 P2.10 P2.11 P2.13 P2.15 P2.19 P2.21 P2.22 P2.23 P2.24 P2_1.1 P2_1.6 P2_1.8 P2_1.9 P2_1.10 P2_1.11 P2_2.1 P2_2.2 P2_2.5 P2_2.6 P2_2.7 TRANS1.1 TRANS1.5 U1.29 U1.V U2.3 U2.V
copper on no net:
  other v2: 77.503,57.183 112.903,57.183 77.503,92.583 112.903,92.583
  other v3: 104.621,55.716 104.621,58.716 104.621,58.716
  other v4: 86.9,56.815 86.9,61.315

## Polygon pours and split planes (outlines as drawn)
GND on Top Layer "GND" (solid, remove dead copper, pour order 66): 75.776,94.272 75.776,55.488 114.56,55.488 114.56,94.272
VDD on Top Layer "VDD" (solid, pour order 42): 96.824,73.664 97.92,73.664 97.92,73.92 96.824,74.76 96.824,75.969 96.04,75.969 96.04,73.664
IOVDD on Top Layer "VDD" (solid, pour order 44): 92.271,62.624 93.76,62.624 93.76,64.384 92.271,64.384
VDD on Top Layer "VDD" (solid, pour order 38): 89.408,75.073 89.408,73.344 90.944,73.344 90.944,75.073
VDD_CC2590 on Top Layer "VDD" (solid, pour order 30): 87.552,84.071 87.552,82.151 89.152,82.151 89.152,84.071
3V3 on POWER "POWER-3V3" (solid, remove dead copper, pour order 62): 77.503,92.583 77.503,57.183 112.903,57.183 112.903,92.583
VDD_CC2590 on POWER "POWER-VDD_CC2590" (solid, pour order 52): 88.192,84.16 104.896,84.16 104.896,77.056 88.192,77.056
no net on POWER "POWER-No Net" (solid, pour order 56): 77.056,92.992
no net on POWER "POWER-No Net 1" (solid, pour order 54): 79.04,94.4
no net on POWER "POWER-No Net 2" (solid, pour order 50): 88.256,84.096
VDD on POWER "POWER-VDD" (solid, pour order 48): 89.92,75.136 94.976,75.136 94.976,76.848 95.056,76.928 103.36,76.928 105.408,76.928 105.433,71.552 103.36,71.552 103.36,64.64 93.12,64.64 93.12,71.68 89.92,71.68
IOVDD on POWER "POWER-IOVDD" (solid, pour order 46): 90.944,69.696 92.8,69.696 92.8,64.448 103.68,64.448 103.68,71.521 105.216,71.521 105.216,62.592 90.944,62.592
GND on GND "GND" (solid, pour order 22): 75.776,94.272 75.776,55.488 114.56,55.488 114.56,94.272
GND on Bottom Layer "GND" (solid, remove dead copper, pour order 64): 75.776,94.272 75.776,55.488 114.56,55.488 114.56,94.272

## Other copper
Top Layer:
  pour cut-out: 91.329,89.939 88.639,89.939 88.639,88.034 91.329,88.034
  pour cut-out: 98.742,89.896 98.742,83.307 99.343,83.307 99.342,82.313 98.742,81.713 98.742,80.833 98.492,80.583 97.012,80.583 97.024,88.167 91.084,88.147 91.07,89.896
  pour cut-out: 97.857,75.688 97.857,72.256 99.132,72.256 99.132,75.748 99.487,76.238 99.542,76.667 99.542,77.863 97.487,77.863 97.487,76.433
  pour cut-out: 94.78,73.164 94.78,66.674 94.79,66.684 101.184,66.684 101.184,73.04 101.285,73.14
  pour cut-out: 96.12,81.298 96.12,77.192 99.852,77.192 101.022,79.94 101.022,80.628 99.587,80.628 99.587,82.06 98.902,82.06 98.902,81.292 97.195,81.298 97.195,81.938 97.195,82.06 96.882,82.06 96.882,81.292

## Silkscreen, mask and mechanical layers (free items; w line width, h text height)
Mechanical 1:
  lines w0.254: 112.779,94.869 77.597,94.869 ccw(c77.534,92.519) 75.184,92.459 75.184,57.277 ccw(c77.534,57.213) 77.594,54.864 112.776,54.864 ccw(c112.84,57.213) 115.189,57.274 115.189,92.456 ccw(c112.84,92.519) 112.779,94.869 ; 77.503,57.183 112.903,57.183 112.903,92.583 77.503,92.583 77.503,57.183

## Text inside footprints (layer, text, board x,y; h text height)
P2: Top Overlay "1" at 79.248,58.42 h1.27 r90; Top Overlay "2" at 76.708,58.42 h1.27 r90; Top Overlay "23" at 79.248,90.424 h1.27 r90; Top Overlay "24" at 76.708,90.424 h1.27 r90